# EAGLE board tiny-ws2812b-panel (EAGLE 6.5.0)
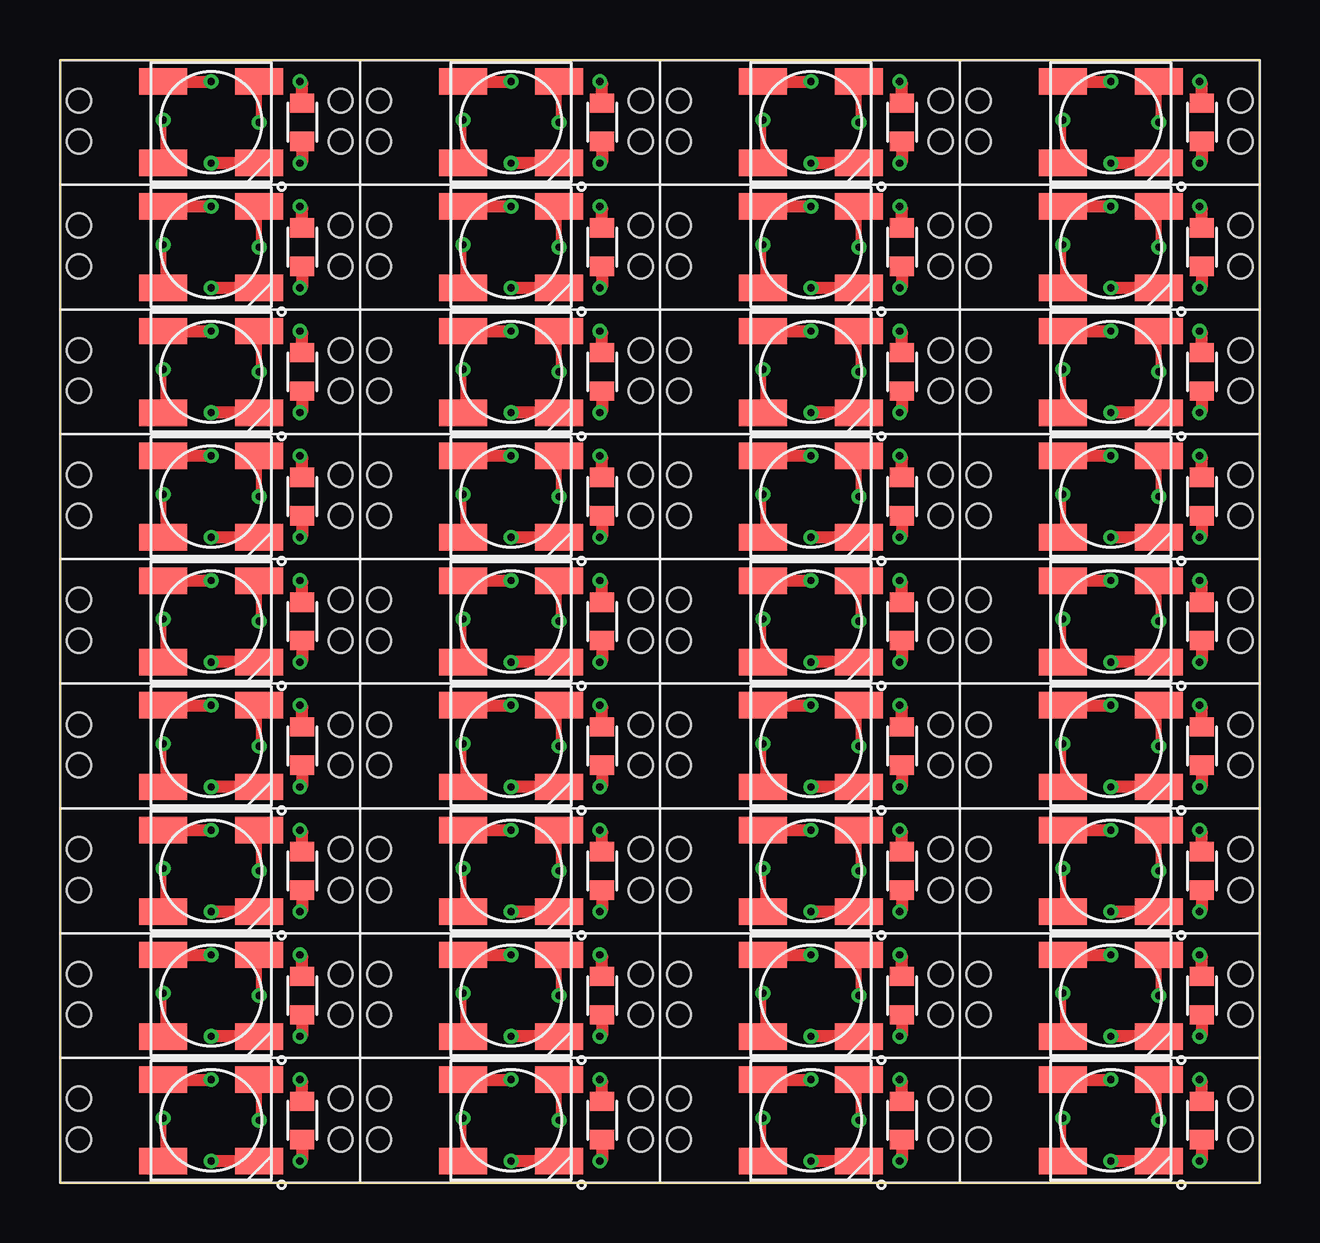
[diagram p0: board, top side]
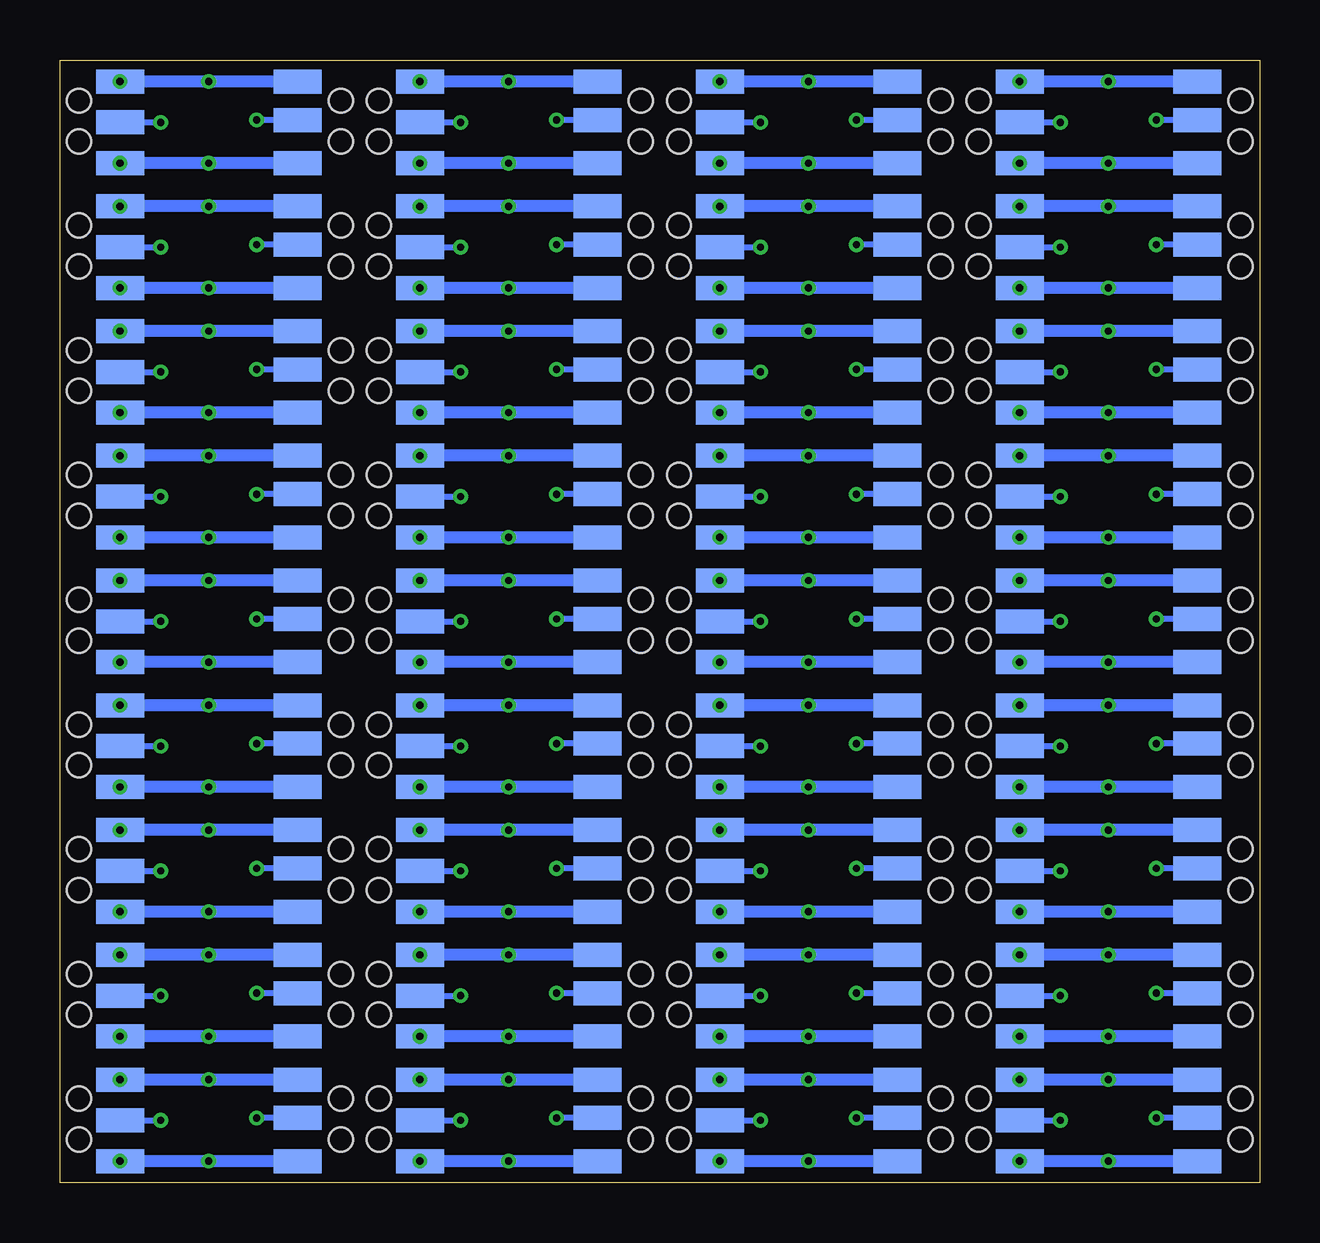
[diagram p1: board, bottom side, seen from below]

Size 50 x 46.8 mm. Coordinates in mm from the lower left corner, seen from the top.
Outline: 50,46.8 0,46.8 0,0 50,0 50,46.8
Copper layers (1*16): Top 0.035mm / dielectric 1.5mm / Bottom 0.035mm
Design rules "SeeedStudio_DRU-2layer_no_angle_20130527 *": minimum track width 6mil, minimum drill 12mil, track to track 6mil, track to pad 6mil, pad to pad 6mil, via to via 6mil, smd to smd 0mil, copper to edge 10mil, drill to drill 10mil, minimum pad ring 10mil, minimum via ring 6mil, stop-mask expansion 2mil, vias tented up to drill 25mil, thermal gap 10mil
Holes 1 mm at 0.8,3.5 0.8,1.8 11.7,3.5 11.7,1.8 13.3,3.5 13.3,1.8 24.2,3.5 24.2,1.8 25.8,3.5 25.8,1.8 36.7,3.5 36.7,1.8 38.3,3.5 38.3,1.8 49.2,3.5 49.2,1.8 0.8,8.7 0.8,7 11.7,8.7 11.7,7 13.3,8.7 13.3,7 24.2,8.7 24.2,7 25.8,8.7 25.8,7 36.7,8.7 36.7,7 38.3,8.7 38.3,7 49.2,8.7 49.2,7 0.8,13.9 0.8,12.2 11.7,13.9 11.7,12.2 13.3,13.9 13.3,12.2 24.2,13.9 24.2,12.2 25.8,13.9 25.8,12.2 36.7,13.9 36.7,12.2 38.3,13.9 38.3,12.2 49.2,13.9 49.2,12.2 0.8,19.1 0.8,17.4 11.7,19.1 11.7,17.4 13.3,19.1 13.3,17.4 24.2,19.1 24.2,17.4 25.8,19.1 25.8,17.4 36.7,19.1 36.7,17.4 38.3,19.1 38.3,17.4 49.2,19.1 49.2,17.4 0.8,24.3 0.8,22.6 11.7,24.3 11.7,22.6 13.3,24.3 13.3,22.6 24.2,24.3 24.2,22.6 25.8,24.3 25.8,22.6 36.7,24.3 36.7,22.6 38.3,24.3 38.3,22.6 49.2,24.3 49.2,22.6 0.8,29.5 0.8,27.8 11.7,29.5 11.7,27.8 13.3,29.5 13.3,27.8 24.2,29.5 24.2,27.8 25.8,29.5 25.8,27.8 36.7,29.5 36.7,27.8 38.3,29.5 38.3,27.8 49.2,29.5 49.2,27.8 0.8,34.7 0.8,33 11.7,34.7 11.7,33 13.3,34.7 13.3,33 24.2,34.7 24.2,33 25.8,34.7 25.8,33 36.7,34.7 36.7,33 38.3,34.7 38.3,33 49.2,34.7 49.2,33 0.8,39.9 0.8,38.2 11.7,39.9 11.7,38.2 13.3,39.9 13.3,38.2 24.2,39.9 24.2,38.2 25.8,39.9 25.8,38.2 36.7,39.9 36.7,38.2 38.3,39.9 38.3,38.2 49.2,39.9 49.2,38.2 0.8,45.1 0.8,43.4 11.7,45.1 11.7,43.4 13.3,45.1 13.3,43.4 24.2,45.1 24.2,43.4 25.8,45.1 25.8,43.4 36.7,45.1 36.7,43.4 38.3,45.1 38.3,43.4 49.2,45.1 49.2,43.4

## Footprints (pad centres in the part's own frame; a part is rotated, then mirrored left to right if it is on the bottom)
0603MIL = smd 0.8 x 1: 1 -0.8,0; 2 0.8,0
WS2812B = smd 2 x 1.1: DIN 2,1.7; DOUT -2,-1.7; VDD -2,1.7; VSS 2,-1.7
PAD_Q2X1MM = smd 2 x 1: 1 0,0

## Placement (x,y rotation side)
C1  100n  [0603MIL]  10.1,2.6 90 top
C2  100n  [0603MIL]  22.6,2.6 90 top
C3  100n  [0603MIL]  35.1,2.6 90 top
C4  100n  [0603MIL]  47.6,2.6 90 top
C5  100n  [0603MIL]  10.1,7.8 90 top
C6  100n  [0603MIL]  22.6,7.8 90 top
C7  100n  [0603MIL]  35.1,7.8 90 top
C8  100n  [0603MIL]  47.6,7.8 90 top
C9  100n  [0603MIL]  10.1,13 90 top
C10  100n  [0603MIL]  22.6,13 90 top
C11  100n  [0603MIL]  35.1,13 90 top
C12  100n  [0603MIL]  47.6,13 90 top
C13  100n  [0603MIL]  10.1,18.2 90 top
C14  100n  [0603MIL]  22.6,18.2 90 top
C15  100n  [0603MIL]  35.1,18.2 90 top
C16  100n  [0603MIL]  47.6,18.2 90 top
C17  100n  [0603MIL]  10.1,23.4 90 top
C18  100n  [0603MIL]  22.6,23.4 90 top
C19  100n  [0603MIL]  35.1,23.4 90 top
C20  100n  [0603MIL]  47.6,23.4 90 top
C21  100n  [0603MIL]  10.1,28.6 90 top
C22  100n  [0603MIL]  22.6,28.6 90 top
C23  100n  [0603MIL]  35.1,28.6 90 top
C24  100n  [0603MIL]  47.6,28.6 90 top
C25  100n  [0603MIL]  10.1,33.8 90 top
C26  100n  [0603MIL]  22.6,33.8 90 top
C27  100n  [0603MIL]  35.1,33.8 90 top
C28  100n  [0603MIL]  47.6,33.8 90 top
C29  100n  [0603MIL]  10.1,39 90 top
C30  100n  [0603MIL]  22.6,39 90 top
C31  100n  [0603MIL]  35.1,39 90 top
C32  100n  [0603MIL]  47.6,39 90 top
C33  100n  [0603MIL]  10.1,44.2 90 top
C34  100n  [0603MIL]  22.6,44.2 90 top
C35  100n  [0603MIL]  35.1,44.2 90 top
C36  100n  [0603MIL]  47.6,44.2 90 top
LED1  WS2812B  [WS2812B]  6.3,2.6 0 top
LED2  WS2812B  [WS2812B]  18.8,2.6 0 top
LED3  WS2812B  [WS2812B]  31.3,2.6 0 top
LED4  WS2812B  [WS2812B]  43.8,2.6 0 top
LED5  WS2812B  [WS2812B]  6.3,7.8 0 top
LED6  WS2812B  [WS2812B]  18.8,7.8 0 top
LED7  WS2812B  [WS2812B]  31.3,7.8 0 top
LED8  WS2812B  [WS2812B]  43.8,7.8 0 top
LED9  WS2812B  [WS2812B]  6.3,13 0 top
LED10  WS2812B  [WS2812B]  18.8,13 0 top
LED11  WS2812B  [WS2812B]  31.3,13 0 top
LED12  WS2812B  [WS2812B]  43.8,13 0 top
LED13  WS2812B  [WS2812B]  6.3,18.2 0 top
LED14  WS2812B  [WS2812B]  18.8,18.2 0 top
LED15  WS2812B  [WS2812B]  31.3,18.2 0 top
LED16  WS2812B  [WS2812B]  43.8,18.2 0 top
LED17  WS2812B  [WS2812B]  6.3,23.4 0 top
LED18  WS2812B  [WS2812B]  18.8,23.4 0 top
LED19  WS2812B  [WS2812B]  31.3,23.4 0 top
LED20  WS2812B  [WS2812B]  43.8,23.4 0 top
LED21  WS2812B  [WS2812B]  6.3,28.6 0 top
LED22  WS2812B  [WS2812B]  18.8,28.6 0 top
LED23  WS2812B  [WS2812B]  31.3,28.6 0 top
LED24  WS2812B  [WS2812B]  43.8,28.6 0 top
LED25  WS2812B  [WS2812B]  6.3,33.8 0 top
LED26  WS2812B  [WS2812B]  18.8,33.8 0 top
LED27  WS2812B  [WS2812B]  31.3,33.8 0 top
LED28  WS2812B  [WS2812B]  43.8,33.8 0 top
LED29  WS2812B  [WS2812B]  6.3,39 0 top
LED30  WS2812B  [WS2812B]  18.8,39 0 top
LED31  WS2812B  [WS2812B]  31.3,39 0 top
LED32  WS2812B  [WS2812B]  43.8,39 0 top
LED33  WS2812B  [WS2812B]  6.3,44.2 0 top
LED34  WS2812B  [WS2812B]  18.8,44.2 0 top
LED35  WS2812B  [WS2812B]  31.3,44.2 0 top
LED36  WS2812B  [WS2812B]  43.8,44.2 0 top
TP1  TP_Q2X1MM  [PAD_Q2X1MM]  10,4.3 0 bottom
TP2  TP_Q2X1MM  [PAD_Q2X1MM]  10,2.6 0 bottom
TP3  TP_Q2X1MM  [PAD_Q2X1MM]  10,0.9 0 bottom
TP4  TP_Q2X1MM  [PAD_Q2X1MM]  2.6,0.9 0 bottom
TP5  TP_Q2X1MM  [PAD_Q2X1MM]  2.6,2.7 0 bottom
TP6  TP_Q2X1MM  [PAD_Q2X1MM]  2.6,4.3 0 bottom
TP7  TP_Q2X1MM  [PAD_Q2X1MM]  22.5,4.3 0 bottom
TP8  TP_Q2X1MM  [PAD_Q2X1MM]  22.5,2.6 0 bottom
TP9  TP_Q2X1MM  [PAD_Q2X1MM]  22.5,0.9 0 bottom
TP10  TP_Q2X1MM  [PAD_Q2X1MM]  15.1,0.9 0 bottom
TP11  TP_Q2X1MM  [PAD_Q2X1MM]  15.1,2.7 0 bottom
TP12  TP_Q2X1MM  [PAD_Q2X1MM]  15.1,4.3 0 bottom
TP13  TP_Q2X1MM  [PAD_Q2X1MM]  35,4.3 0 bottom
TP14  TP_Q2X1MM  [PAD_Q2X1MM]  35,2.6 0 bottom
TP15  TP_Q2X1MM  [PAD_Q2X1MM]  35,0.9 0 bottom
TP16  TP_Q2X1MM  [PAD_Q2X1MM]  27.6,0.9 0 bottom
TP17  TP_Q2X1MM  [PAD_Q2X1MM]  27.6,2.7 0 bottom
TP18  TP_Q2X1MM  [PAD_Q2X1MM]  27.6,4.3 0 bottom
TP19  TP_Q2X1MM  [PAD_Q2X1MM]  47.5,4.3 0 bottom
TP20  TP_Q2X1MM  [PAD_Q2X1MM]  47.5,2.6 0 bottom
TP21  TP_Q2X1MM  [PAD_Q2X1MM]  47.5,0.9 0 bottom
TP22  TP_Q2X1MM  [PAD_Q2X1MM]  40.1,0.9 0 bottom
TP23  TP_Q2X1MM  [PAD_Q2X1MM]  40.1,2.7 0 bottom
TP24  TP_Q2X1MM  [PAD_Q2X1MM]  40.1,4.3 0 bottom
TP25  TP_Q2X1MM  [PAD_Q2X1MM]  10,9.5 0 bottom
TP26  TP_Q2X1MM  [PAD_Q2X1MM]  10,7.8 0 bottom
TP27  TP_Q2X1MM  [PAD_Q2X1MM]  10,6.1 0 bottom
TP28  TP_Q2X1MM  [PAD_Q2X1MM]  2.6,6.1 0 bottom
TP29  TP_Q2X1MM  [PAD_Q2X1MM]  2.6,7.9 0 bottom
TP30  TP_Q2X1MM  [PAD_Q2X1MM]  2.6,9.5 0 bottom
TP31  TP_Q2X1MM  [PAD_Q2X1MM]  22.5,9.5 0 bottom
TP32  TP_Q2X1MM  [PAD_Q2X1MM]  22.5,7.8 0 bottom
TP33  TP_Q2X1MM  [PAD_Q2X1MM]  22.5,6.1 0 bottom
TP34  TP_Q2X1MM  [PAD_Q2X1MM]  15.1,6.1 0 bottom
TP35  TP_Q2X1MM  [PAD_Q2X1MM]  15.1,7.9 0 bottom
TP36  TP_Q2X1MM  [PAD_Q2X1MM]  15.1,9.5 0 bottom
TP37  TP_Q2X1MM  [PAD_Q2X1MM]  35,9.5 0 bottom
TP38  TP_Q2X1MM  [PAD_Q2X1MM]  35,7.8 0 bottom
TP39  TP_Q2X1MM  [PAD_Q2X1MM]  35,6.1 0 bottom
TP40  TP_Q2X1MM  [PAD_Q2X1MM]  27.6,6.1 0 bottom
TP41  TP_Q2X1MM  [PAD_Q2X1MM]  27.6,7.9 0 bottom
TP42  TP_Q2X1MM  [PAD_Q2X1MM]  27.6,9.5 0 bottom
TP43  TP_Q2X1MM  [PAD_Q2X1MM]  47.5,9.5 0 bottom
TP44  TP_Q2X1MM  [PAD_Q2X1MM]  47.5,7.8 0 bottom
TP45  TP_Q2X1MM  [PAD_Q2X1MM]  47.5,6.1 0 bottom
TP46  TP_Q2X1MM  [PAD_Q2X1MM]  40.1,6.1 0 bottom
TP47  TP_Q2X1MM  [PAD_Q2X1MM]  40.1,7.9 0 bottom
TP48  TP_Q2X1MM  [PAD_Q2X1MM]  40.1,9.5 0 bottom
TP49  TP_Q2X1MM  [PAD_Q2X1MM]  10,14.7 0 bottom
TP50  TP_Q2X1MM  [PAD_Q2X1MM]  10,13 0 bottom
TP51  TP_Q2X1MM  [PAD_Q2X1MM]  10,11.3 0 bottom
TP52  TP_Q2X1MM  [PAD_Q2X1MM]  2.6,11.3 0 bottom
TP53  TP_Q2X1MM  [PAD_Q2X1MM]  2.6,13.1 0 bottom
TP54  TP_Q2X1MM  [PAD_Q2X1MM]  2.6,14.7 0 bottom
TP55  TP_Q2X1MM  [PAD_Q2X1MM]  22.5,14.7 0 bottom
TP56  TP_Q2X1MM  [PAD_Q2X1MM]  22.5,13 0 bottom
TP57  TP_Q2X1MM  [PAD_Q2X1MM]  22.5,11.3 0 bottom
TP58  TP_Q2X1MM  [PAD_Q2X1MM]  15.1,11.3 0 bottom
TP59  TP_Q2X1MM  [PAD_Q2X1MM]  15.1,13.1 0 bottom
TP60  TP_Q2X1MM  [PAD_Q2X1MM]  15.1,14.7 0 bottom
TP61  TP_Q2X1MM  [PAD_Q2X1MM]  35,14.7 0 bottom
TP62  TP_Q2X1MM  [PAD_Q2X1MM]  35,13 0 bottom
TP63  TP_Q2X1MM  [PAD_Q2X1MM]  35,11.3 0 bottom
TP64  TP_Q2X1MM  [PAD_Q2X1MM]  27.6,11.3 0 bottom
TP65  TP_Q2X1MM  [PAD_Q2X1MM]  27.6,13.1 0 bottom
TP66  TP_Q2X1MM  [PAD_Q2X1MM]  27.6,14.7 0 bottom
TP67  TP_Q2X1MM  [PAD_Q2X1MM]  47.5,14.7 0 bottom
TP68  TP_Q2X1MM  [PAD_Q2X1MM]  47.5,13 0 bottom
TP69  TP_Q2X1MM  [PAD_Q2X1MM]  47.5,11.3 0 bottom
TP70  TP_Q2X1MM  [PAD_Q2X1MM]  40.1,11.3 0 bottom
TP71  TP_Q2X1MM  [PAD_Q2X1MM]  40.1,13.1 0 bottom
TP72  TP_Q2X1MM  [PAD_Q2X1MM]  40.1,14.7 0 bottom
TP73  TP_Q2X1MM  [PAD_Q2X1MM]  10,19.9 0 bottom
TP74  TP_Q2X1MM  [PAD_Q2X1MM]  10,18.2 0 bottom
TP75  TP_Q2X1MM  [PAD_Q2X1MM]  10,16.5 0 bottom
TP76  TP_Q2X1MM  [PAD_Q2X1MM]  2.6,16.5 0 bottom
TP77  TP_Q2X1MM  [PAD_Q2X1MM]  2.6,18.3 0 bottom
TP78  TP_Q2X1MM  [PAD_Q2X1MM]  2.6,19.9 0 bottom
TP79  TP_Q2X1MM  [PAD_Q2X1MM]  22.5,19.9 0 bottom
TP80  TP_Q2X1MM  [PAD_Q2X1MM]  22.5,18.2 0 bottom
TP81  TP_Q2X1MM  [PAD_Q2X1MM]  22.5,16.5 0 bottom
TP82  TP_Q2X1MM  [PAD_Q2X1MM]  15.1,16.5 0 bottom
TP83  TP_Q2X1MM  [PAD_Q2X1MM]  15.1,18.3 0 bottom
TP84  TP_Q2X1MM  [PAD_Q2X1MM]  15.1,19.9 0 bottom
TP85  TP_Q2X1MM  [PAD_Q2X1MM]  35,19.9 0 bottom
TP86  TP_Q2X1MM  [PAD_Q2X1MM]  35,18.2 0 bottom
TP87  TP_Q2X1MM  [PAD_Q2X1MM]  35,16.5 0 bottom
TP88  TP_Q2X1MM  [PAD_Q2X1MM]  27.6,16.5 0 bottom
TP89  TP_Q2X1MM  [PAD_Q2X1MM]  27.6,18.3 0 bottom
TP90  TP_Q2X1MM  [PAD_Q2X1MM]  27.6,19.9 0 bottom
TP91  TP_Q2X1MM  [PAD_Q2X1MM]  47.5,19.9 0 bottom
TP92  TP_Q2X1MM  [PAD_Q2X1MM]  47.5,18.2 0 bottom
TP93  TP_Q2X1MM  [PAD_Q2X1MM]  47.5,16.5 0 bottom
TP94  TP_Q2X1MM  [PAD_Q2X1MM]  40.1,16.5 0 bottom
TP95  TP_Q2X1MM  [PAD_Q2X1MM]  40.1,18.3 0 bottom
TP96  TP_Q2X1MM  [PAD_Q2X1MM]  40.1,19.9 0 bottom
TP97  TP_Q2X1MM  [PAD_Q2X1MM]  10,25.1 0 bottom
TP98  TP_Q2X1MM  [PAD_Q2X1MM]  10,23.4 0 bottom
TP99  TP_Q2X1MM  [PAD_Q2X1MM]  10,21.7 0 bottom
TP100  TP_Q2X1MM  [PAD_Q2X1MM]  2.6,21.7 0 bottom
TP101  TP_Q2X1MM  [PAD_Q2X1MM]  2.6,23.5 0 bottom
TP102  TP_Q2X1MM  [PAD_Q2X1MM]  2.6,25.1 0 bottom
TP103  TP_Q2X1MM  [PAD_Q2X1MM]  22.5,25.1 0 bottom
TP104  TP_Q2X1MM  [PAD_Q2X1MM]  22.5,23.4 0 bottom
TP105  TP_Q2X1MM  [PAD_Q2X1MM]  22.5,21.7 0 bottom
TP106  TP_Q2X1MM  [PAD_Q2X1MM]  15.1,21.7 0 bottom
TP107  TP_Q2X1MM  [PAD_Q2X1MM]  15.1,23.5 0 bottom
TP108  TP_Q2X1MM  [PAD_Q2X1MM]  15.1,25.1 0 bottom
TP109  TP_Q2X1MM  [PAD_Q2X1MM]  35,25.1 0 bottom
TP110  TP_Q2X1MM  [PAD_Q2X1MM]  35,23.4 0 bottom
TP111  TP_Q2X1MM  [PAD_Q2X1MM]  35,21.7 0 bottom
TP112  TP_Q2X1MM  [PAD_Q2X1MM]  27.6,21.7 0 bottom
TP113  TP_Q2X1MM  [PAD_Q2X1MM]  27.6,23.5 0 bottom
TP114  TP_Q2X1MM  [PAD_Q2X1MM]  27.6,25.1 0 bottom
TP115  TP_Q2X1MM  [PAD_Q2X1MM]  47.5,25.1 0 bottom
TP116  TP_Q2X1MM  [PAD_Q2X1MM]  47.5,23.4 0 bottom
TP117  TP_Q2X1MM  [PAD_Q2X1MM]  47.5,21.7 0 bottom
TP118  TP_Q2X1MM  [PAD_Q2X1MM]  40.1,21.7 0 bottom
TP119  TP_Q2X1MM  [PAD_Q2X1MM]  40.1,23.5 0 bottom
TP120  TP_Q2X1MM  [PAD_Q2X1MM]  40.1,25.1 0 bottom
TP121  TP_Q2X1MM  [PAD_Q2X1MM]  10,30.3 0 bottom
TP122  TP_Q2X1MM  [PAD_Q2X1MM]  10,28.6 0 bottom
TP123  TP_Q2X1MM  [PAD_Q2X1MM]  10,26.9 0 bottom
TP124  TP_Q2X1MM  [PAD_Q2X1MM]  2.6,26.9 0 bottom
TP125  TP_Q2X1MM  [PAD_Q2X1MM]  2.6,28.7 0 bottom
TP126  TP_Q2X1MM  [PAD_Q2X1MM]  2.6,30.3 0 bottom
TP127  TP_Q2X1MM  [PAD_Q2X1MM]  22.5,30.3 0 bottom
TP128  TP_Q2X1MM  [PAD_Q2X1MM]  22.5,28.6 0 bottom
TP129  TP_Q2X1MM  [PAD_Q2X1MM]  22.5,26.9 0 bottom
TP130  TP_Q2X1MM  [PAD_Q2X1MM]  15.1,26.9 0 bottom
TP131  TP_Q2X1MM  [PAD_Q2X1MM]  15.1,28.7 0 bottom
TP132  TP_Q2X1MM  [PAD_Q2X1MM]  15.1,30.3 0 bottom
TP133  TP_Q2X1MM  [PAD_Q2X1MM]  35,30.3 0 bottom
TP134  TP_Q2X1MM  [PAD_Q2X1MM]  35,28.6 0 bottom
TP135  TP_Q2X1MM  [PAD_Q2X1MM]  35,26.9 0 bottom
TP136  TP_Q2X1MM  [PAD_Q2X1MM]  27.6,26.9 0 bottom
TP137  TP_Q2X1MM  [PAD_Q2X1MM]  27.6,28.7 0 bottom
TP138  TP_Q2X1MM  [PAD_Q2X1MM]  27.6,30.3 0 bottom
TP139  TP_Q2X1MM  [PAD_Q2X1MM]  47.5,30.3 0 bottom
TP140  TP_Q2X1MM  [PAD_Q2X1MM]  47.5,28.6 0 bottom
TP141  TP_Q2X1MM  [PAD_Q2X1MM]  47.5,26.9 0 bottom
TP142  TP_Q2X1MM  [PAD_Q2X1MM]  40.1,26.9 0 bottom
TP143  TP_Q2X1MM  [PAD_Q2X1MM]  40.1,28.7 0 bottom
TP144  TP_Q2X1MM  [PAD_Q2X1MM]  40.1,30.3 0 bottom
TP145  TP_Q2X1MM  [PAD_Q2X1MM]  10,35.5 0 bottom
TP146  TP_Q2X1MM  [PAD_Q2X1MM]  10,33.8 0 bottom
TP147  TP_Q2X1MM  [PAD_Q2X1MM]  10,32.1 0 bottom
TP148  TP_Q2X1MM  [PAD_Q2X1MM]  2.6,32.1 0 bottom
TP149  TP_Q2X1MM  [PAD_Q2X1MM]  2.6,33.9 0 bottom
TP150  TP_Q2X1MM  [PAD_Q2X1MM]  2.6,35.5 0 bottom
TP151  TP_Q2X1MM  [PAD_Q2X1MM]  22.5,35.5 0 bottom
TP152  TP_Q2X1MM  [PAD_Q2X1MM]  22.5,33.8 0 bottom
TP153  TP_Q2X1MM  [PAD_Q2X1MM]  22.5,32.1 0 bottom
TP154  TP_Q2X1MM  [PAD_Q2X1MM]  15.1,32.1 0 bottom
TP155  TP_Q2X1MM  [PAD_Q2X1MM]  15.1,33.9 0 bottom
TP156  TP_Q2X1MM  [PAD_Q2X1MM]  15.1,35.5 0 bottom
TP157  TP_Q2X1MM  [PAD_Q2X1MM]  35,35.5 0 bottom
TP158  TP_Q2X1MM  [PAD_Q2X1MM]  35,33.8 0 bottom
TP159  TP_Q2X1MM  [PAD_Q2X1MM]  35,32.1 0 bottom
TP160  TP_Q2X1MM  [PAD_Q2X1MM]  27.6,32.1 0 bottom
TP161  TP_Q2X1MM  [PAD_Q2X1MM]  27.6,33.9 0 bottom
TP162  TP_Q2X1MM  [PAD_Q2X1MM]  27.6,35.5 0 bottom
TP163  TP_Q2X1MM  [PAD_Q2X1MM]  47.5,35.5 0 bottom
TP164  TP_Q2X1MM  [PAD_Q2X1MM]  47.5,33.8 0 bottom
TP165  TP_Q2X1MM  [PAD_Q2X1MM]  47.5,32.1 0 bottom
TP166  TP_Q2X1MM  [PAD_Q2X1MM]  40.1,32.1 0 bottom
TP167  TP_Q2X1MM  [PAD_Q2X1MM]  40.1,33.9 0 bottom
TP168  TP_Q2X1MM  [PAD_Q2X1MM]  40.1,35.5 0 bottom
TP169  TP_Q2X1MM  [PAD_Q2X1MM]  10,40.7 0 bottom
TP170  TP_Q2X1MM  [PAD_Q2X1MM]  10,39 0 bottom
TP171  TP_Q2X1MM  [PAD_Q2X1MM]  10,37.3 0 bottom
TP172  TP_Q2X1MM  [PAD_Q2X1MM]  2.6,37.3 0 bottom
TP173  TP_Q2X1MM  [PAD_Q2X1MM]  2.6,39.1 0 bottom
TP174  TP_Q2X1MM  [PAD_Q2X1MM]  2.6,40.7 0 bottom
TP175  TP_Q2X1MM  [PAD_Q2X1MM]  22.5,40.7 0 bottom
TP176  TP_Q2X1MM  [PAD_Q2X1MM]  22.5,39 0 bottom
TP177  TP_Q2X1MM  [PAD_Q2X1MM]  22.5,37.3 0 bottom
TP178  TP_Q2X1MM  [PAD_Q2X1MM]  15.1,37.3 0 bottom
TP179  TP_Q2X1MM  [PAD_Q2X1MM]  15.1,39.1 0 bottom
TP180  TP_Q2X1MM  [PAD_Q2X1MM]  15.1,40.7 0 bottom
TP181  TP_Q2X1MM  [PAD_Q2X1MM]  35,40.7 0 bottom
TP182  TP_Q2X1MM  [PAD_Q2X1MM]  35,39 0 bottom
TP183  TP_Q2X1MM  [PAD_Q2X1MM]  35,37.3 0 bottom
TP184  TP_Q2X1MM  [PAD_Q2X1MM]  27.6,37.3 0 bottom
TP185  TP_Q2X1MM  [PAD_Q2X1MM]  27.6,39.1 0 bottom
TP186  TP_Q2X1MM  [PAD_Q2X1MM]  27.6,40.7 0 bottom
TP187  TP_Q2X1MM  [PAD_Q2X1MM]  47.5,40.7 0 bottom
TP188  TP_Q2X1MM  [PAD_Q2X1MM]  47.5,39 0 bottom
TP189  TP_Q2X1MM  [PAD_Q2X1MM]  47.5,37.3 0 bottom
TP190  TP_Q2X1MM  [PAD_Q2X1MM]  40.1,37.3 0 bottom
TP191  TP_Q2X1MM  [PAD_Q2X1MM]  40.1,39.1 0 bottom
TP192  TP_Q2X1MM  [PAD_Q2X1MM]  40.1,40.7 0 bottom
TP193  TP_Q2X1MM  [PAD_Q2X1MM]  10,45.9 0 bottom
TP194  TP_Q2X1MM  [PAD_Q2X1MM]  10,44.2 0 bottom
TP195  TP_Q2X1MM  [PAD_Q2X1MM]  10,42.5 0 bottom
TP196  TP_Q2X1MM  [PAD_Q2X1MM]  2.6,42.5 0 bottom
TP197  TP_Q2X1MM  [PAD_Q2X1MM]  2.6,44.3 0 bottom
TP198  TP_Q2X1MM  [PAD_Q2X1MM]  2.6,45.9 0 bottom
TP199  TP_Q2X1MM  [PAD_Q2X1MM]  22.5,45.9 0 bottom
TP200  TP_Q2X1MM  [PAD_Q2X1MM]  22.5,44.2 0 bottom
TP201  TP_Q2X1MM  [PAD_Q2X1MM]  22.5,42.5 0 bottom
TP202  TP_Q2X1MM  [PAD_Q2X1MM]  15.1,42.5 0 bottom
TP203  TP_Q2X1MM  [PAD_Q2X1MM]  15.1,44.3 0 bottom
TP204  TP_Q2X1MM  [PAD_Q2X1MM]  15.1,45.9 0 bottom
TP205  TP_Q2X1MM  [PAD_Q2X1MM]  35,45.9 0 bottom
TP206  TP_Q2X1MM  [PAD_Q2X1MM]  35,44.2 0 bottom
TP207  TP_Q2X1MM  [PAD_Q2X1MM]  35,42.5 0 bottom
TP208  TP_Q2X1MM  [PAD_Q2X1MM]  27.6,42.5 0 bottom
TP209  TP_Q2X1MM  [PAD_Q2X1MM]  27.6,44.3 0 bottom
TP210  TP_Q2X1MM  [PAD_Q2X1MM]  27.6,45.9 0 bottom
TP211  TP_Q2X1MM  [PAD_Q2X1MM]  47.5,45.9 0 bottom
TP212  TP_Q2X1MM  [PAD_Q2X1MM]  47.5,44.2 0 bottom
TP213  TP_Q2X1MM  [PAD_Q2X1MM]  47.5,42.5 0 bottom
TP214  TP_Q2X1MM  [PAD_Q2X1MM]  40.1,42.5 0 bottom
TP215  TP_Q2X1MM  [PAD_Q2X1MM]  40.1,44.3 0 bottom
TP216  TP_Q2X1MM  [PAD_Q2X1MM]  40.1,45.9 0 bottom

## Library data of the parts
C1-C36 LED1-LED36 TP1-TP216 = tiny

## Nets
GND: C1.1 LED1.VSS TP3.1 TP4.1
GND1: C2.1 LED2.VSS TP9.1 TP10.1
GND2: C3.1 LED3.VSS TP15.1 TP16.1
GND3: C4.1 LED4.VSS TP21.1 TP22.1
GND4: C5.1 LED5.VSS TP27.1 TP28.1
GND5: C6.1 LED6.VSS TP33.1 TP34.1
GND6: C7.1 LED7.VSS TP39.1 TP40.1
GND7: C8.1 LED8.VSS TP45.1 TP46.1
GND8: C9.1 LED9.VSS TP51.1 TP52.1
GND9: C10.1 LED10.VSS TP57.1 TP58.1
GND10: C11.1 LED11.VSS TP63.1 TP64.1
GND11: C12.1 LED12.VSS TP69.1 TP70.1
GND12: C13.1 LED13.VSS TP75.1 TP76.1
GND13: C14.1 LED14.VSS TP81.1 TP82.1
GND14: C15.1 LED15.VSS TP87.1 TP88.1
GND15: C16.1 LED16.VSS TP93.1 TP94.1
GND16: C17.1 LED17.VSS TP99.1 TP100.1
GND17: C18.1 LED18.VSS TP105.1 TP106.1
GND18: C19.1 LED19.VSS TP111.1 TP112.1
GND19: C20.1 LED20.VSS TP117.1 TP118.1
GND20: C21.1 LED21.VSS TP123.1 TP124.1
GND21: C22.1 LED22.VSS TP129.1 TP130.1
GND22: C23.1 LED23.VSS TP135.1 TP136.1
GND23: C24.1 LED24.VSS TP141.1 TP142.1
GND24: C25.1 LED25.VSS TP147.1 TP148.1
GND25: C26.1 LED26.VSS TP153.1 TP154.1
GND26: C27.1 LED27.VSS TP159.1 TP160.1
GND27: C28.1 LED28.VSS TP165.1 TP166.1
GND28: C29.1 LED29.VSS TP171.1 TP172.1
GND29: C30.1 LED30.VSS TP177.1 TP178.1
GND30: C31.1 LED31.VSS TP183.1 TP184.1
GND31: C32.1 LED32.VSS TP189.1 TP190.1
GND32: C33.1 LED33.VSS TP195.1 TP196.1
GND33: C34.1 LED34.VSS TP201.1 TP202.1
GND34: C35.1 LED35.VSS TP207.1 TP208.1
GND35: C36.1 LED36.VSS TP213.1 TP214.1
N$1: LED1.DOUT TP5.1
N$2: LED1.DIN TP2.1
N$3: LED2.DOUT TP11.1
N$4: LED2.DIN TP8.1
N$5: LED3.DOUT TP17.1
N$6: LED3.DIN TP14.1
N$7: LED4.DOUT TP23.1
N$8: LED4.DIN TP20.1
N$9: LED5.DOUT TP29.1
N$10: LED5.DIN TP26.1
N$11: LED6.DOUT TP35.1
N$12: LED6.DIN TP32.1
N$13: LED7.DOUT TP41.1
N$14: LED7.DIN TP38.1
N$15: LED8.DOUT TP47.1
N$16: LED8.DIN TP44.1
N$17: LED9.DOUT TP53.1
N$18: LED9.DIN TP50.1
N$19: LED10.DOUT TP59.1
N$20: LED10.DIN TP56.1
N$21: LED11.DOUT TP65.1
N$22: LED11.DIN TP62.1
N$23: LED12.DOUT TP71.1
N$24: LED12.DIN TP68.1
N$25: LED13.DOUT TP77.1
N$26: LED13.DIN TP74.1
N$27: LED14.DOUT TP83.1
N$28: LED14.DIN TP80.1
N$29: LED15.DOUT TP89.1
N$30: LED15.DIN TP86.1
N$31: LED16.DOUT TP95.1
N$32: LED16.DIN TP92.1
N$33: LED17.DOUT TP101.1
N$34: LED17.DIN TP98.1
N$35: LED18.DOUT TP107.1
N$36: LED18.DIN TP104.1
N$37: LED19.DOUT TP113.1
N$38: LED19.DIN TP110.1
N$39: LED20.DOUT TP119.1
N$40: LED20.DIN TP116.1
N$41: LED21.DOUT TP125.1
N$42: LED21.DIN TP122.1
N$43: LED22.DOUT TP131.1
N$44: LED22.DIN TP128.1
N$45: LED23.DOUT TP137.1
N$46: LED23.DIN TP134.1
N$47: LED24.DOUT TP143.1
N$48: LED24.DIN TP140.1
N$49: LED25.DOUT TP149.1
N$50: LED25.DIN TP146.1
N$51: LED26.DOUT TP155.1
N$52: LED26.DIN TP152.1
N$53: LED27.DOUT TP161.1
N$54: LED27.DIN TP158.1
N$55: LED28.DOUT TP167.1
N$56: LED28.DIN TP164.1
N$57: LED29.DOUT TP173.1
N$58: LED29.DIN TP170.1
N$59: LED30.DOUT TP179.1
N$60: LED30.DIN TP176.1
N$61: LED31.DOUT TP185.1
N$62: LED31.DIN TP182.1
N$63: LED32.DOUT TP191.1
N$64: LED32.DIN TP188.1
N$65: LED33.DOUT TP197.1
N$66: LED33.DIN TP194.1
N$67: LED34.DOUT TP203.1
N$68: LED34.DIN TP200.1
N$69: LED35.DOUT TP209.1
N$70: LED35.DIN TP206.1
N$71: LED36.DOUT TP215.1
N$72: LED36.DIN TP212.1
VCC: C1.2 LED1.VDD TP1.1 TP6.1
VCC1: C2.2 LED2.VDD TP7.1 TP12.1
VCC2: C3.2 LED3.VDD TP13.1 TP18.1
VCC3: C4.2 LED4.VDD TP19.1 TP24.1
VCC4: C5.2 LED5.VDD TP25.1 TP30.1
VCC5: C6.2 LED6.VDD TP31.1 TP36.1
VCC6: C7.2 LED7.VDD TP37.1 TP42.1
VCC7: C8.2 LED8.VDD TP43.1 TP48.1
VCC8: C9.2 LED9.VDD TP49.1 TP54.1
VCC9: C10.2 LED10.VDD TP55.1 TP60.1
VCC10: C11.2 LED11.VDD TP61.1 TP66.1
VCC11: C12.2 LED12.VDD TP67.1 TP72.1
VCC12: C13.2 LED13.VDD TP73.1 TP78.1
VCC13: C14.2 LED14.VDD TP79.1 TP84.1
VCC14: C15.2 LED15.VDD TP85.1 TP90.1
VCC15: C16.2 LED16.VDD TP91.1 TP96.1
VCC16: C17.2 LED17.VDD TP97.1 TP102.1
VCC17: C18.2 LED18.VDD TP103.1 TP108.1
VCC18: C19.2 LED19.VDD TP109.1 TP114.1
VCC19: C20.2 LED20.VDD TP115.1 TP120.1
VCC20: C21.2 LED21.VDD TP121.1 TP126.1
VCC21: C22.2 LED22.VDD TP127.1 TP132.1
VCC22: C23.2 LED23.VDD TP133.1 TP138.1
VCC23: C24.2 LED24.VDD TP139.1 TP144.1
VCC24: C25.2 LED25.VDD TP145.1 TP150.1
VCC25: C26.2 LED26.VDD TP151.1 TP156.1
VCC26: C27.2 LED27.VDD TP157.1 TP162.1
VCC27: C28.2 LED28.VDD TP163.1 TP168.1
VCC28: C29.2 LED29.VDD TP169.1 TP174.1
VCC29: C30.2 LED30.VDD TP175.1 TP180.1
VCC30: C31.2 LED31.VDD TP181.1 TP186.1
VCC31: C32.2 LED32.VDD TP187.1 TP192.1
VCC32: C33.2 LED33.VDD TP193.1 TP198.1
VCC33: C34.2 LED34.VDD TP199.1 TP204.1
VCC34: C35.2 LED35.VDD TP205.1 TP210.1
VCC35: C36.2 LED36.VDD TP211.1 TP216.1

## Tracks (layer width: path | path; a pad name or v marks a point on that pad's centre or on a via)
GND  (via drill 0.3)
  Top 0.5: LED1.VSS v6.3,0.9 | C1.1 10.1,1 TP3.1
  Bottom 0.5: TP4.1 v6.3,0.9 TP3.1
  other vias: 10,0.9
GND1  (via drill 0.3)
  Top 0.5: LED2.VSS v18.8,0.9 | C2.1 22.6,1 TP9.1
  Bottom 0.5: TP10.1 v18.8,0.9 TP9.1
  other vias: 22.5,0.9
GND2  (via drill 0.3)
  Top 0.5: LED3.VSS v31.3,0.9 | C3.1 35.1,1 TP15.1
  Bottom 0.5: TP16.1 v31.3,0.9 TP15.1
  other vias: 35,0.9
GND3  (via drill 0.3)
  Top 0.5: LED4.VSS v43.8,0.9 | C4.1 47.6,1 TP21.1
  Bottom 0.5: TP22.1 v43.8,0.9 TP21.1
  other vias: 47.5,0.9
GND4  (via drill 0.3)
  Top 0.5: LED5.VSS v6.3,6.1 | C5.1 10.1,6.2 TP27.1
  Bottom 0.5: TP28.1 v6.3,6.1 TP27.1
  other vias: 10,6.1
GND5  (via drill 0.3)
  Top 0.5: LED6.VSS v18.8,6.1 | C6.1 22.6,6.2 TP33.1
  Bottom 0.5: TP34.1 v18.8,6.1 TP33.1
  other vias: 22.5,6.1
GND6  (via drill 0.3)
  Top 0.5: LED7.VSS v31.3,6.1 | C7.1 35.1,6.2 TP39.1
  Bottom 0.5: TP40.1 v31.3,6.1 TP39.1
  other vias: 35,6.1
GND7  (via drill 0.3)
  Top 0.5: LED8.VSS v43.8,6.1 | C8.1 47.6,6.2 TP45.1
  Bottom 0.5: TP46.1 v43.8,6.1 TP45.1
  other vias: 47.5,6.1
GND8  (via drill 0.3)
  Top 0.5: LED9.VSS v6.3,11.3 | C9.1 10.1,11.4 TP51.1
  Bottom 0.5: TP52.1 v6.3,11.3 TP51.1
  other vias: 10,11.3
GND9  (via drill 0.3)
  Top 0.5: LED10.VSS v18.8,11.3 | C10.1 22.6,11.4 TP57.1
  Bottom 0.5: TP58.1 v18.8,11.3 TP57.1
  other vias: 22.5,11.3
GND10  (via drill 0.3)
  Top 0.5: LED11.VSS v31.3,11.3 | C11.1 35.1,11.4 TP63.1
  Bottom 0.5: TP64.1 v31.3,11.3 TP63.1
  other vias: 35,11.3
GND11  (via drill 0.3)
  Top 0.5: LED12.VSS v43.8,11.3 | C12.1 47.6,11.4 TP69.1
  Bottom 0.5: TP70.1 v43.8,11.3 TP69.1
  other vias: 47.5,11.3
GND12  (via drill 0.3)
  Top 0.5: LED13.VSS v6.3,16.5 | C13.1 10.1,16.6 TP75.1
  Bottom 0.5: TP76.1 v6.3,16.5 TP75.1
  other vias: 10,16.5
GND13  (via drill 0.3)
  Top 0.5: LED14.VSS v18.8,16.5 | C14.1 22.6,16.6 TP81.1
  Bottom 0.5: TP82.1 v18.8,16.5 TP81.1
  other vias: 22.5,16.5
GND14  (via drill 0.3)
  Top 0.5: LED15.VSS v31.3,16.5 | C15.1 35.1,16.6 TP87.1
  Bottom 0.5: TP88.1 v31.3,16.5 TP87.1
  other vias: 35,16.5
GND15  (via drill 0.3)
  Top 0.5: LED16.VSS v43.8,16.5 | C16.1 47.6,16.6 TP93.1
  Bottom 0.5: TP94.1 v43.8,16.5 TP93.1
  other vias: 47.5,16.5
GND16  (via drill 0.3)
  Top 0.5: LED17.VSS v6.3,21.7 | C17.1 10.1,21.8 TP99.1
  Bottom 0.5: TP100.1 v6.3,21.7 TP99.1
  other vias: 10,21.7
GND17  (via drill 0.3)
  Top 0.5: LED18.VSS v18.8,21.7 | C18.1 22.6,21.8 TP105.1
  Bottom 0.5: TP106.1 v18.8,21.7 TP105.1
  other vias: 22.5,21.7
GND18  (via drill 0.3)
  Top 0.5: LED19.VSS v31.3,21.7 | C19.1 35.1,21.8 TP111.1
  Bottom 0.5: TP112.1 v31.3,21.7 TP111.1
  other vias: 35,21.7
GND19  (via drill 0.3)
  Top 0.5: LED20.VSS v43.8,21.7 | C20.1 47.6,21.8 TP117.1
  Bottom 0.5: TP118.1 v43.8,21.7 TP117.1
  other vias: 47.5,21.7
GND20  (via drill 0.3)
  Top 0.5: LED21.VSS v6.3,26.9 | C21.1 10.1,27 TP123.1
  Bottom 0.5: TP124.1 v6.3,26.9 TP123.1
  other vias: 10,26.9
GND21  (via drill 0.3)
  Top 0.5: LED22.VSS v18.8,26.9 | C22.1 22.6,27 TP129.1
  Bottom 0.5: TP130.1 v18.8,26.9 TP129.1
  other vias: 22.5,26.9
GND22  (via drill 0.3)
  Top 0.5: LED23.VSS v31.3,26.9 | C23.1 35.1,27 TP135.1
  Bottom 0.5: TP136.1 v31.3,26.9 TP135.1
  other vias: 35,26.9
GND23  (via drill 0.3)
  Top 0.5: LED24.VSS v43.8,26.9 | C24.1 47.6,27 TP141.1
  Bottom 0.5: TP142.1 v43.8,26.9 TP141.1
  other vias: 47.5,26.9
GND24  (via drill 0.3)
  Top 0.5: LED25.VSS v6.3,32.1 | C25.1 10.1,32.2 TP147.1
  Bottom 0.5: TP148.1 v6.3,32.1 TP147.1
  other vias: 10,32.1
GND25  (via drill 0.3)
  Top 0.5: LED26.VSS v18.8,32.1 | C26.1 22.6,32.2 TP153.1
  Bottom 0.5: TP154.1 v18.8,32.1 TP153.1
  other vias: 22.5,32.1
GND26  (via drill 0.3)
  Top 0.5: LED27.VSS v31.3,32.1 | C27.1 35.1,32.2 TP159.1
  Bottom 0.5: TP160.1 v31.3,32.1 TP159.1
  other vias: 35,32.1
GND27  (via drill 0.3)
  Top 0.5: LED28.VSS v43.8,32.1 | C28.1 47.6,32.2 TP165.1
  Bottom 0.5: TP166.1 v43.8,32.1 TP165.1
  other vias: 47.5,32.1
GND28  (via drill 0.3)
  Top 0.5: LED29.VSS v6.3,37.3 | C29.1 10.1,37.4 TP171.1
  Bottom 0.5: TP172.1 v6.3,37.3 TP171.1
  other vias: 10,37.3
GND29  (via drill 0.3)
  Top 0.5: LED30.VSS v18.8,37.3 | C30.1 22.6,37.4 TP177.1
  Bottom 0.5: TP178.1 v18.8,37.3 TP177.1
  other vias: 22.5,37.3
GND30  (via drill 0.3)
  Top 0.5: LED31.VSS v31.3,37.3 | C31.1 35.1,37.4 TP183.1
  Bottom 0.5: TP184.1 v31.3,37.3 TP183.1
  other vias: 35,37.3
GND31  (via drill 0.3)
  Top 0.5: LED32.VSS v43.8,37.3 | C32.1 47.6,37.4 TP189.1
  Bottom 0.5: TP190.1 v43.8,37.3 TP189.1
  other vias: 47.5,37.3
GND32  (via drill 0.3)
  Top 0.5: LED33.VSS v6.3,42.5 | C33.1 10.1,42.6 TP195.1
  Bottom 0.5: TP196.1 v6.3,42.5 TP195.1
  other vias: 10,42.5
GND33  (via drill 0.3)
  Top 0.5: LED34.VSS v18.8,42.5 | C34.1 22.6,42.6 TP201.1
  Bottom 0.5: TP202.1 v18.8,42.5 TP201.1
  other vias: 22.5,42.5
GND34  (via drill 0.3)
  Top 0.5: LED35.VSS v31.3,42.5 | C35.1 35.1,42.6 TP207.1
  Bottom 0.5: TP208.1 v31.3,42.5 TP207.1
  other vias: 35,42.5
GND35  (via drill 0.3)
  Top 0.5: LED36.VSS v43.8,42.5 | C36.1 47.6,42.6 TP213.1
  Bottom 0.5: TP214.1 v43.8,42.5 TP213.1
  other vias: 47.5,42.5
N$1  (via drill 0.3)
  Top 0.25: v4.3,2.7 LED1.DOUT
  Bottom 0.25: TP5.1 v4.3,2.7
N$2  (via drill 0.3)
  Top 0.25: v8.3,2.6 LED1.DIN
  Bottom 0.25: TP2.1 v8.3,2.6
N$3  (via drill 0.3)
  Top 0.25: v16.8,2.7 LED2.DOUT
  Bottom 0.25: TP11.1 v16.8,2.7
N$4  (via drill 0.3)
  Top 0.25: v20.8,2.6 LED2.DIN
  Bottom 0.25: TP8.1 v20.8,2.6
N$5  (via drill 0.3)
  Top 0.25: v29.3,2.7 LED3.DOUT
  Bottom 0.25: TP17.1 v29.3,2.7
N$6  (via drill 0.3)
  Top 0.25: v33.3,2.6 LED3.DIN
  Bottom 0.25: TP14.1 v33.3,2.6
N$7  (via drill 0.3)
  Top 0.25: v41.8,2.7 LED4.DOUT
  Bottom 0.25: TP23.1 v41.8,2.7
N$8  (via drill 0.3)
  Top 0.25: v45.8,2.6 LED4.DIN
  Bottom 0.25: TP20.1 v45.8,2.6
N$9  (via drill 0.3)
  Top 0.25: v4.3,7.9 LED5.DOUT
  Bottom 0.25: TP29.1 v4.3,7.9
N$10  (via drill 0.3)
  Top 0.25: v8.3,7.8 LED5.DIN
  Bottom 0.25: TP26.1 v8.3,7.8
N$11  (via drill 0.3)
  Top 0.25: v16.8,7.9 LED6.DOUT
  Bottom 0.25: TP35.1 v16.8,7.9
N$12  (via drill 0.3)
  Top 0.25: v20.8,7.8 LED6.DIN
  Bottom 0.25: TP32.1 v20.8,7.8
N$13  (via drill 0.3)
  Top 0.25: v29.3,7.9 LED7.DOUT
  Bottom 0.25: TP41.1 v29.3,7.9
N$14  (via drill 0.3)
  Top 0.25: v33.3,7.8 LED7.DIN
  Bottom 0.25: TP38.1 v33.3,7.8
N$15  (via drill 0.3)
  Top 0.25: v41.8,7.9 LED8.DOUT
  Bottom 0.25: TP47.1 v41.8,7.9
N$16  (via drill 0.3)
  Top 0.25: v45.8,7.8 LED8.DIN
  Bottom 0.25: TP44.1 v45.8,7.8
N$17  (via drill 0.3)
  Top 0.25: v4.3,13.1 LED9.DOUT
  Bottom 0.25: TP53.1 v4.3,13.1
N$18  (via drill 0.3)
  Top 0.25: v8.3,13 LED9.DIN
  Bottom 0.25: TP50.1 v8.3,13
N$19  (via drill 0.3)
  Top 0.25: v16.8,13.1 LED10.DOUT
  Bottom 0.25: TP59.1 v16.8,13.1
N$20  (via drill 0.3)
  Top 0.25: v20.8,13 LED10.DIN
  Bottom 0.25: TP56.1 v20.8,13
N$21  (via drill 0.3)
  Top 0.25: v29.3,13.1 LED11.DOUT
  Bottom 0.25: TP65.1 v29.3,13.1
N$22  (via drill 0.3)
  Top 0.25: v33.3,13 LED11.DIN
  Bottom 0.25: TP62.1 v33.3,13
N$23  (via drill 0.3)
  Top 0.25: v41.8,13.1 LED12.DOUT
  Bottom 0.25: TP71.1 v41.8,13.1
N$24  (via drill 0.3)
  Top 0.25: v45.8,13 LED12.DIN
  Bottom 0.25: TP68.1 v45.8,13
N$25  (via drill 0.3)
  Top 0.25: v4.3,18.3 LED13.DOUT
  Bottom 0.25: TP77.1 v4.3,18.3
N$26  (via drill 0.3)
  Top 0.25: v8.3,18.2 LED13.DIN
  Bottom 0.25: TP74.1 v8.3,18.2
N$27  (via drill 0.3)
  Top 0.25: v16.8,18.3 LED14.DOUT
  Bottom 0.25: TP83.1 v16.8,18.3
N$28  (via drill 0.3)
  Top 0.25: v20.8,18.2 LED14.DIN
  Bottom 0.25: TP80.1 v20.8,18.2
N$29  (via drill 0.3)
  Top 0.25: v29.3,18.3 LED15.DOUT
  Bottom 0.25: TP89.1 v29.3,18.3
N$30  (via drill 0.3)
  Top 0.25: v33.3,18.2 LED15.DIN
  Bottom 0.25: TP86.1 v33.3,18.2
N$31  (via drill 0.3)
  Top 0.25: v41.8,18.3 LED16.DOUT
  Bottom 0.25: TP95.1 v41.8,18.3
N$32  (via drill 0.3)
  Top 0.25: v45.8,18.2 LED16.DIN
  Bottom 0.25: TP92.1 v45.8,18.2
N$33  (via drill 0.3)
  Top 0.25: v4.3,23.5 LED17.DOUT
  Bottom 0.25: TP101.1 v4.3,23.5
N$34  (via drill 0.3)
  Top 0.25: v8.3,23.4 LED17.DIN
  Bottom 0.25: TP98.1 v8.3,23.4
N$35  (via drill 0.3)
  Top 0.25: v16.8,23.5 LED18.DOUT
  Bottom 0.25: TP107.1 v16.8,23.5
N$36  (via drill 0.3)
  Top 0.25: v20.8,23.4 LED18.DIN
  Bottom 0.25: TP104.1 v20.8,23.4
N$37  (via drill 0.3)
  Top 0.25: v29.3,23.5 LED19.DOUT
  Bottom 0.25: TP113.1 v29.3,23.5
N$38  (via drill 0.3)
  Top 0.25: v33.3,23.4 LED19.DIN
  Bottom 0.25: TP110.1 v33.3,23.4
N$39  (via drill 0.3)
  Top 0.25: v41.8,23.5 LED20.DOUT
  Bottom 0.25: TP119.1 v41.8,23.5
N$40  (via drill 0.3)
  Top 0.25: v45.8,23.4 LED20.DIN
  Bottom 0.25: TP116.1 v45.8,23.4
N$41  (via drill 0.3)
  Top 0.25: v4.3,28.7 LED21.DOUT
  Bottom 0.25: TP125.1 v4.3,28.7
N$42  (via drill 0.3)
  Top 0.25: v8.3,28.6 LED21.DIN
  Bottom 0.25: TP122.1 v8.3,28.6
N$43  (via drill 0.3)
  Top 0.25: v16.8,28.7 LED22.DOUT
  Bottom 0.25: TP131.1 v16.8,28.7
N$44  (via drill 0.3)
  Top 0.25: v20.8,28.6 LED22.DIN
  Bottom 0.25: TP128.1 v20.8,28.6
N$45  (via drill 0.3)
  Top 0.25: v29.3,28.7 LED23.DOUT
  Bottom 0.25: TP137.1 v29.3,28.7
N$46  (via drill 0.3)
  Top 0.25: v33.3,28.6 LED23.DIN
  Bottom 0.25: TP134.1 v33.3,28.6
N$47  (via drill 0.3)
  Top 0.25: v41.8,28.7 LED24.DOUT
  Bottom 0.25: TP143.1 v41.8,28.7
N$48  (via drill 0.3)
  Top 0.25: v45.8,28.6 LED24.DIN
  Bottom 0.25: TP140.1 v45.8,28.6
N$49  (via drill 0.3)
  Top 0.25: v4.3,33.9 LED25.DOUT
  Bottom 0.25: TP149.1 v4.3,33.9
N$50  (via drill 0.3)
  Top 0.25: v8.3,33.8 LED25.DIN
  Bottom 0.25: TP146.1 v8.3,33.8
N$51  (via drill 0.3)
  Top 0.25: v16.8,33.9 LED26.DOUT
  Bottom 0.25: TP155.1 v16.8,33.9
N$52  (via drill 0.3)
  Top 0.25: v20.8,33.8 LED26.DIN
  Bottom 0.25: TP152.1 v20.8,33.8
N$53  (via drill 0.3)
  Top 0.25: v29.3,33.9 LED27.DOUT
  Bottom 0.25: TP161.1 v29.3,33.9
N$54  (via drill 0.3)
  Top 0.25: v33.3,33.8 LED27.DIN
  Bottom 0.25: TP158.1 v33.3,33.8
N$55  (via drill 0.3)
  Top 0.25: v41.8,33.9 LED28.DOUT
  Bottom 0.25: TP167.1 v41.8,33.9
N$56  (via drill 0.3)
  Top 0.25: v45.8,33.8 LED28.DIN
  Bottom 0.25: TP164.1 v45.8,33.8
N$57  (via drill 0.3)
  Top 0.25: v4.3,39.1 LED29.DOUT
  Bottom 0.25: TP173.1 v4.3,39.1
N$58  (via drill 0.3)
  Top 0.25: v8.3,39 LED29.DIN
  Bottom 0.25: TP170.1 v8.3,39
N$59  (via drill 0.3)
  Top 0.25: v16.8,39.1 LED30.DOUT
  Bottom 0.25: TP179.1 v16.8,39.1
N$60  (via drill 0.3)
  Top 0.25: v20.8,39 LED30.DIN
  Bottom 0.25: TP176.1 v20.8,39
N$61  (via drill 0.3)
  Top 0.25: v29.3,39.1 LED31.DOUT
  Bottom 0.25: TP185.1 v29.3,39.1
N$62  (via drill 0.3)
  Top 0.25: v33.3,39 LED31.DIN
  Bottom 0.25: TP182.1 v33.3,39
N$63  (via drill 0.3)
  Top 0.25: v41.8,39.1 LED32.DOUT
  Bottom 0.25: TP191.1 v41.8,39.1
N$64  (via drill 0.3)
  Top 0.25: v45.8,39 LED32.DIN
  Bottom 0.25: TP188.1 v45.8,39
N$65  (via drill 0.3)
  Top 0.25: v4.3,44.3 LED33.DOUT
  Bottom 0.25: TP197.1 v4.3,44.3
N$66  (via drill 0.3)
  Top 0.25: v8.3,44.2 LED33.DIN
  Bottom 0.25: TP194.1 v8.3,44.2
N$67  (via drill 0.3)
  Top 0.25: v16.8,44.3 LED34.DOUT
  Bottom 0.25: TP203.1 v16.8,44.3
N$68  (via drill 0.3)
  Top 0.25: v20.8,44.2 LED34.DIN
  Bottom 0.25: TP200.1 v20.8,44.2
N$69  (via drill 0.3)
  Top 0.25: v29.3,44.3 LED35.DOUT
  Bottom 0.25: TP209.1 v29.3,44.3
N$70  (via drill 0.3)
  Top 0.25: v33.3,44.2 LED35.DIN
  Bottom 0.25: TP206.1 v33.3,44.2
N$71  (via drill 0.3)
  Top 0.25: v41.8,44.3 LED36.DOUT
  Bottom 0.25: TP215.1 v41.8,44.3
N$72  (via drill 0.3)
  Top 0.25: v45.8,44.2 LED36.DIN
  Bottom 0.25: TP212.1 v45.8,44.2
VCC  (via drill 0.3)
  Top 0.5: LED1.VDD v6.3,4.3 | C1.2 10.1,4.2 TP1.1
  Bottom 0.5: TP6.1 v6.3,4.3 TP1.1
  other vias: 10,4.3
VCC1  (via drill 0.3)
  Top 0.5: LED2.VDD v18.8,4.3 | C2.2 22.6,4.2 TP7.1
  Bottom 0.5: TP12.1 v18.8,4.3 TP7.1
  other vias: 22.5,4.3
VCC2  (via drill 0.3)
  Top 0.5: LED3.VDD v31.3,4.3 | C3.2 35.1,4.2 TP13.1
  Bottom 0.5: TP18.1 v31.3,4.3 TP13.1
  other vias: 35,4.3
VCC3  (via drill 0.3)
  Top 0.5: LED4.VDD v43.8,4.3 | C4.2 47.6,4.2 TP19.1
  Bottom 0.5: TP24.1 v43.8,4.3 TP19.1
  other vias: 47.5,4.3
VCC4  (via drill 0.3)
  Top 0.5: LED5.VDD v6.3,9.5 | C5.2 10.1,9.4 TP25.1
  Bottom 0.5: TP30.1 v6.3,9.5 TP25.1
  other vias: 10,9.5
VCC5  (via drill 0.3)
  Top 0.5: LED6.VDD v18.8,9.5 | C6.2 22.6,9.4 TP31.1
  Bottom 0.5: TP36.1 v18.8,9.5 TP31.1
  other vias: 22.5,9.5
VCC6  (via drill 0.3)
  Top 0.5: LED7.VDD v31.3,9.5 | C7.2 35.1,9.4 TP37.1
  Bottom 0.5: TP42.1 v31.3,9.5 TP37.1
  other vias: 35,9.5
VCC7  (via drill 0.3)
  Top 0.5: LED8.VDD v43.8,9.5 | C8.2 47.6,9.4 TP43.1
  Bottom 0.5: TP48.1 v43.8,9.5 TP43.1
  other vias: 47.5,9.5
VCC8  (via drill 0.3)
  Top 0.5: LED9.VDD v6.3,14.7 | C9.2 10.1,14.6 TP49.1
  Bottom 0.5: TP54.1 v6.3,14.7 TP49.1
  other vias: 10,14.7
VCC9  (via drill 0.3)
  Top 0.5: LED10.VDD v18.8,14.7 | C10.2 22.6,14.6 TP55.1
  Bottom 0.5: TP60.1 v18.8,14.7 TP55.1
  other vias: 22.5,14.7
VCC10  (via drill 0.3)
  Top 0.5: LED11.VDD v31.3,14.7 | C11.2 35.1,14.6 TP61.1
  Bottom 0.5: TP66.1 v31.3,14.7 TP61.1
  other vias: 35,14.7
VCC11  (via drill 0.3)
  Top 0.5: LED12.VDD v43.8,14.7 | C12.2 47.6,14.6 TP67.1
  Bottom 0.5: TP72.1 v43.8,14.7 TP67.1
  other vias: 47.5,14.7
VCC12  (via drill 0.3)
  Top 0.5: LED13.VDD v6.3,19.9 | C13.2 10.1,19.8 TP73.1
  Bottom 0.5: TP78.1 v6.3,19.9 TP73.1
  other vias: 10,19.9
VCC13  (via drill 0.3)
  Top 0.5: LED14.VDD v18.8,19.9 | C14.2 22.6,19.8 TP79.1
  Bottom 0.5: TP84.1 v18.8,19.9 TP79.1
  other vias: 22.5,19.9
VCC14  (via drill 0.3)
  Top 0.5: LED15.VDD v31.3,19.9 | C15.2 35.1,19.8 TP85.1
  Bottom 0.5: TP90.1 v31.3,19.9 TP85.1
  other vias: 35,19.9
VCC15  (via drill 0.3)
  Top 0.5: LED16.VDD v43.8,19.9 | C16.2 47.6,19.8 TP91.1
  Bottom 0.5: TP96.1 v43.8,19.9 TP91.1
  other vias: 47.5,19.9
VCC16  (via drill 0.3)
  Top 0.5: LED17.VDD v6.3,25.1 | C17.2 10.1,25 TP97.1
  Bottom 0.5: TP102.1 v6.3,25.1 TP97.1
  other vias: 10,25.1
VCC17  (via drill 0.3)
  Top 0.5: LED18.VDD v18.8,25.1 | C18.2 22.6,25 TP103.1
  Bottom 0.5: TP108.1 v18.8,25.1 TP103.1
  other vias: 22.5,25.1
VCC18  (via drill 0.3)
  Top 0.5: LED19.VDD v31.3,25.1 | C19.2 35.1,25 TP109.1
  Bottom 0.5: TP114.1 v31.3,25.1 TP109.1
  other vias: 35,25.1
VCC19  (via drill 0.3)
  Top 0.5: LED20.VDD v43.8,25.1 | C20.2 47.6,25 TP115.1
  Bottom 0.5: TP120.1 v43.8,25.1 TP115.1
  other vias: 47.5,25.1
VCC20  (via drill 0.3)
  Top 0.5: LED21.VDD v6.3,30.3 | C21.2 10.1,30.2 TP121.1
  Bottom 0.5: TP126.1 v6.3,30.3 TP121.1
  other vias: 10,30.3
VCC21  (via drill 0.3)
  Top 0.5: LED22.VDD v18.8,30.3 | C22.2 22.6,30.2 TP127.1
  Bottom 0.5: TP132.1 v18.8,30.3 TP127.1
  other vias: 22.5,30.3
VCC22  (via drill 0.3)
  Top 0.5: LED23.VDD v31.3,30.3 | C23.2 35.1,30.2 TP133.1
  Bottom 0.5: TP138.1 v31.3,30.3 TP133.1
  other vias: 35,30.3
VCC23  (via drill 0.3)
  Top 0.5: LED24.VDD v43.8,30.3 | C24.2 47.6,30.2 TP139.1
  Bottom 0.5: TP144.1 v43.8,30.3 TP139.1
  other vias: 47.5,30.3
VCC24  (via drill 0.3)
  Top 0.5: LED25.VDD v6.3,35.5 | C25.2 10.1,35.4 TP145.1
  Bottom 0.5: TP150.1 v6.3,35.5 TP145.1
  other vias: 10,35.5
VCC25  (via drill 0.3)
  Top 0.5: LED26.VDD v18.8,35.5 | C26.2 22.6,35.4 TP151.1
  Bottom 0.5: TP156.1 v18.8,35.5 TP151.1
  other vias: 22.5,35.5
VCC26  (via drill 0.3)
  Top 0.5: LED27.VDD v31.3,35.5 | C27.2 35.1,35.4 TP157.1
  Bottom 0.5: TP162.1 v31.3,35.5 TP157.1
  other vias: 35,35.5
VCC27  (via drill 0.3)
  Top 0.5: LED28.VDD v43.8,35.5 | C28.2 47.6,35.4 TP163.1
  Bottom 0.5: TP168.1 v43.8,35.5 TP163.1
  other vias: 47.5,35.5
VCC28  (via drill 0.3)
  Top 0.5: LED29.VDD v6.3,40.7 | C29.2 10.1,40.6 TP169.1
  Bottom 0.5: TP174.1 v6.3,40.7 TP169.1
  other vias: 10,40.7
VCC29  (via drill 0.3)
  Top 0.5: LED30.VDD v18.8,40.7 | C30.2 22.6,40.6 TP175.1
  Bottom 0.5: TP180.1 v18.8,40.7 TP175.1
  other vias: 22.5,40.7
VCC30  (via drill 0.3)
  Top 0.5: LED31.VDD v31.3,40.7 | C31.2 35.1,40.6 TP181.1
  Bottom 0.5: TP186.1 v31.3,40.7 TP181.1
  other vias: 35,40.7
VCC31  (via drill 0.3)
  Top 0.5: LED32.VDD v43.8,40.7 | C32.2 47.6,40.6 TP187.1
  Bottom 0.5: TP192.1 v43.8,40.7 TP187.1
  other vias: 47.5,40.7
VCC32  (via drill 0.3)
  Top 0.5: LED33.VDD v6.3,45.9 | C33.2 10.1,45.8 TP193.1
  Bottom 0.5: TP198.1 v6.3,45.9 TP193.1
  other vias: 10,45.9
VCC33  (via drill 0.3)
  Top 0.5: LED34.VDD v18.8,45.9 | C34.2 22.6,45.8 TP199.1
  Bottom 0.5: TP204.1 v18.8,45.9 TP199.1
  other vias: 22.5,45.9
VCC34  (via drill 0.3)
  Top 0.5: LED35.VDD v31.3,45.9 | C35.2 35.1,45.8 TP205.1
  Bottom 0.5: TP210.1 v31.3,45.9 TP205.1
  other vias: 35,45.9
VCC35  (via drill 0.3)
  Top 0.5: LED36.VDD v43.8,45.9 | C36.2 47.6,45.8 TP211.1
  Bottom 0.5: TP216.1 v43.8,45.9 TP211.1
  other vias: 47.5,45.9